# Altium PCB PCB_IcedTea_2021-08-14.pcbdoc
Units mil, origin at the board's own origin, x right, y up, seen from the top; angles counter-clockwise.
Board outline 4400.78 x 4465 mil, 2 copper layers (Top Layer, Bottom Layer); 39 components, 33 nets, 162 pads, 161 vias.
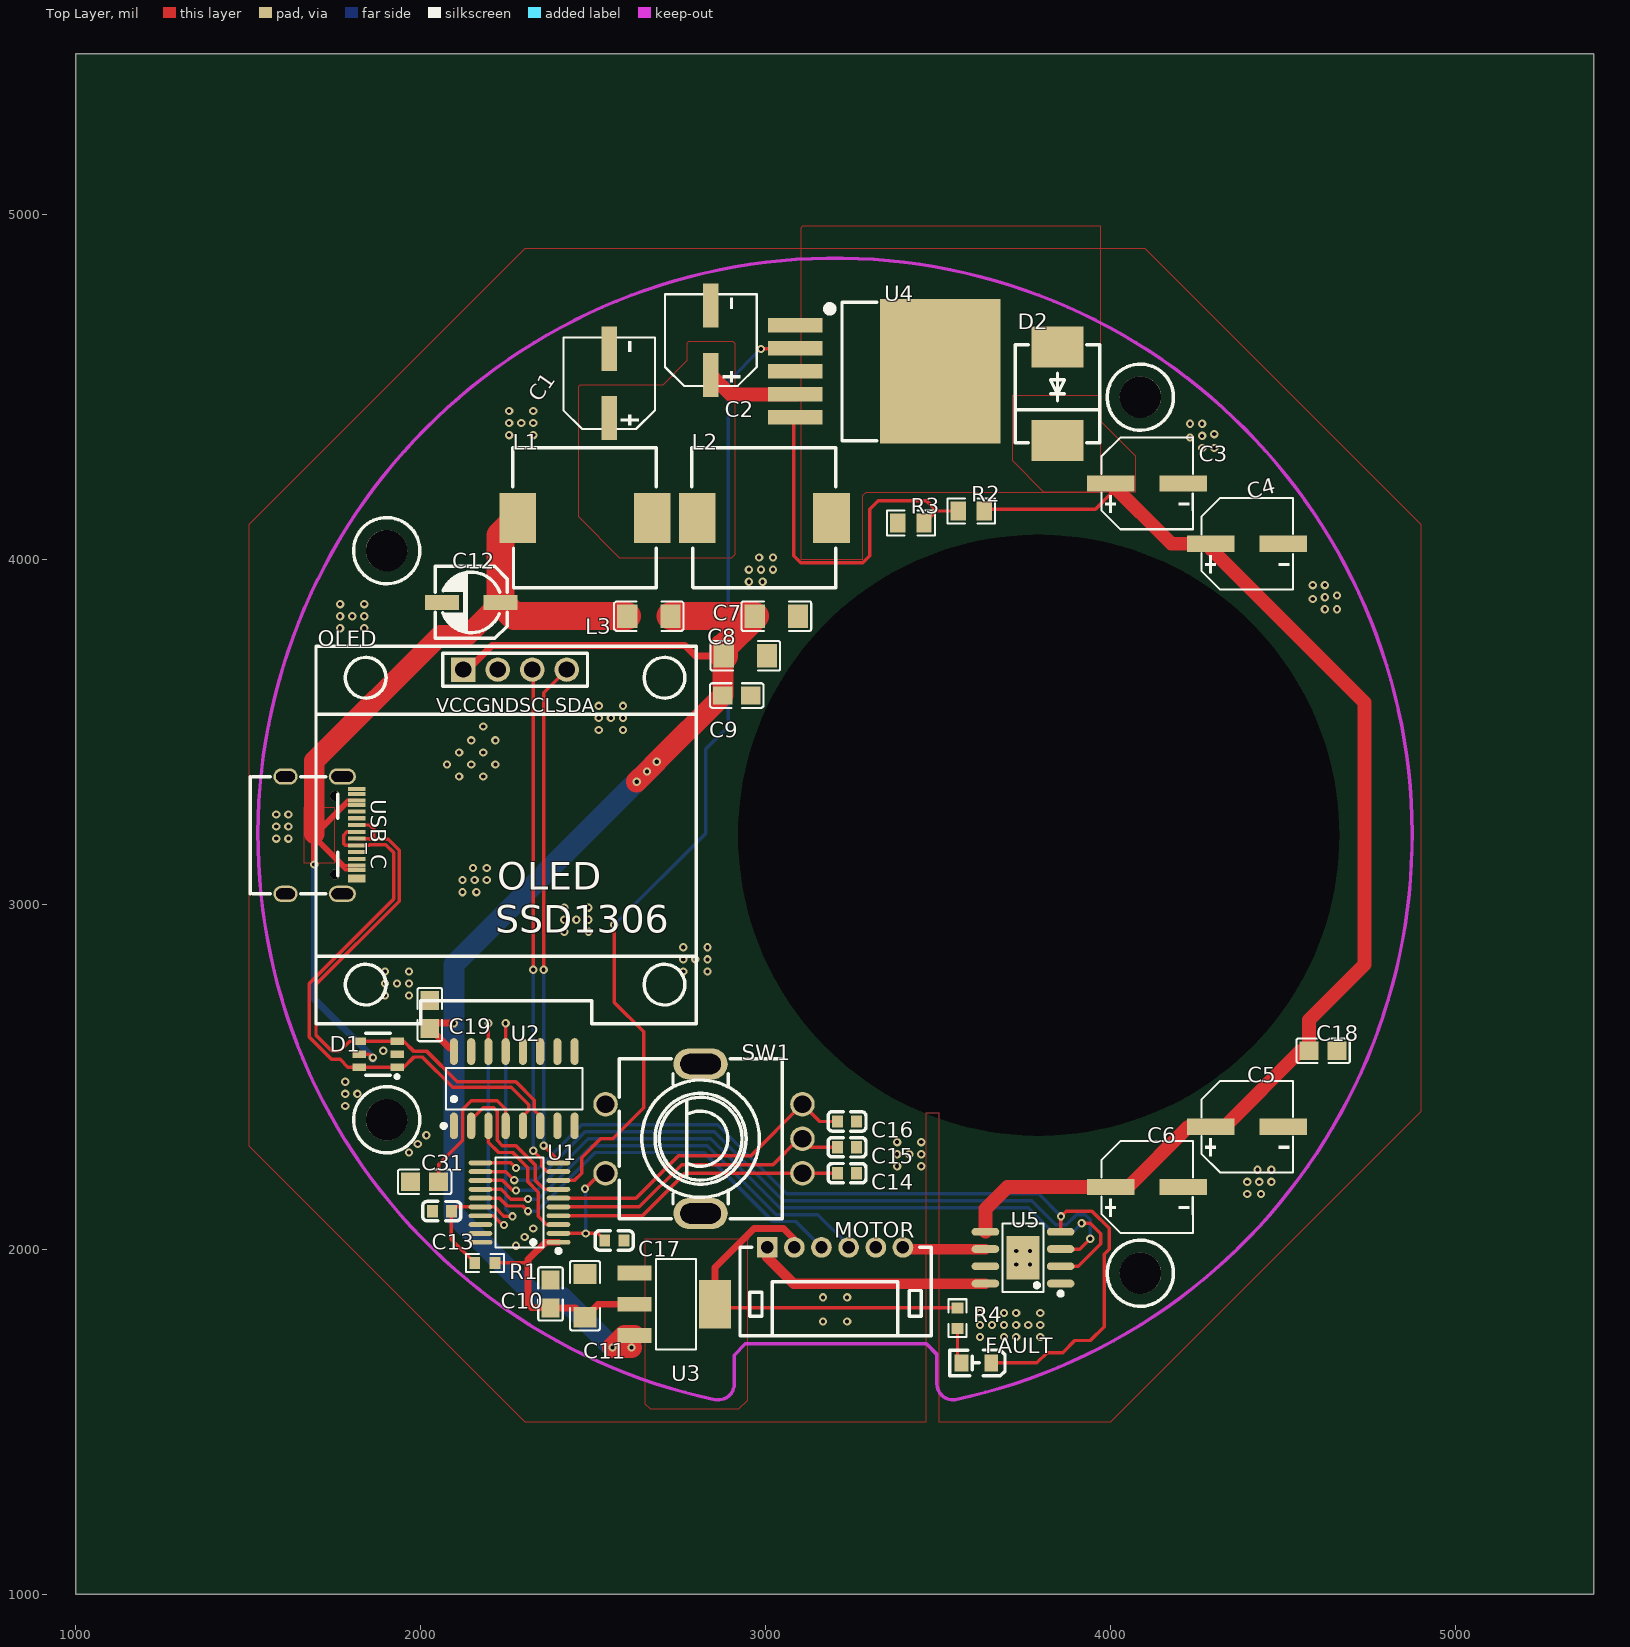
[diagram p0: Top Layer view]
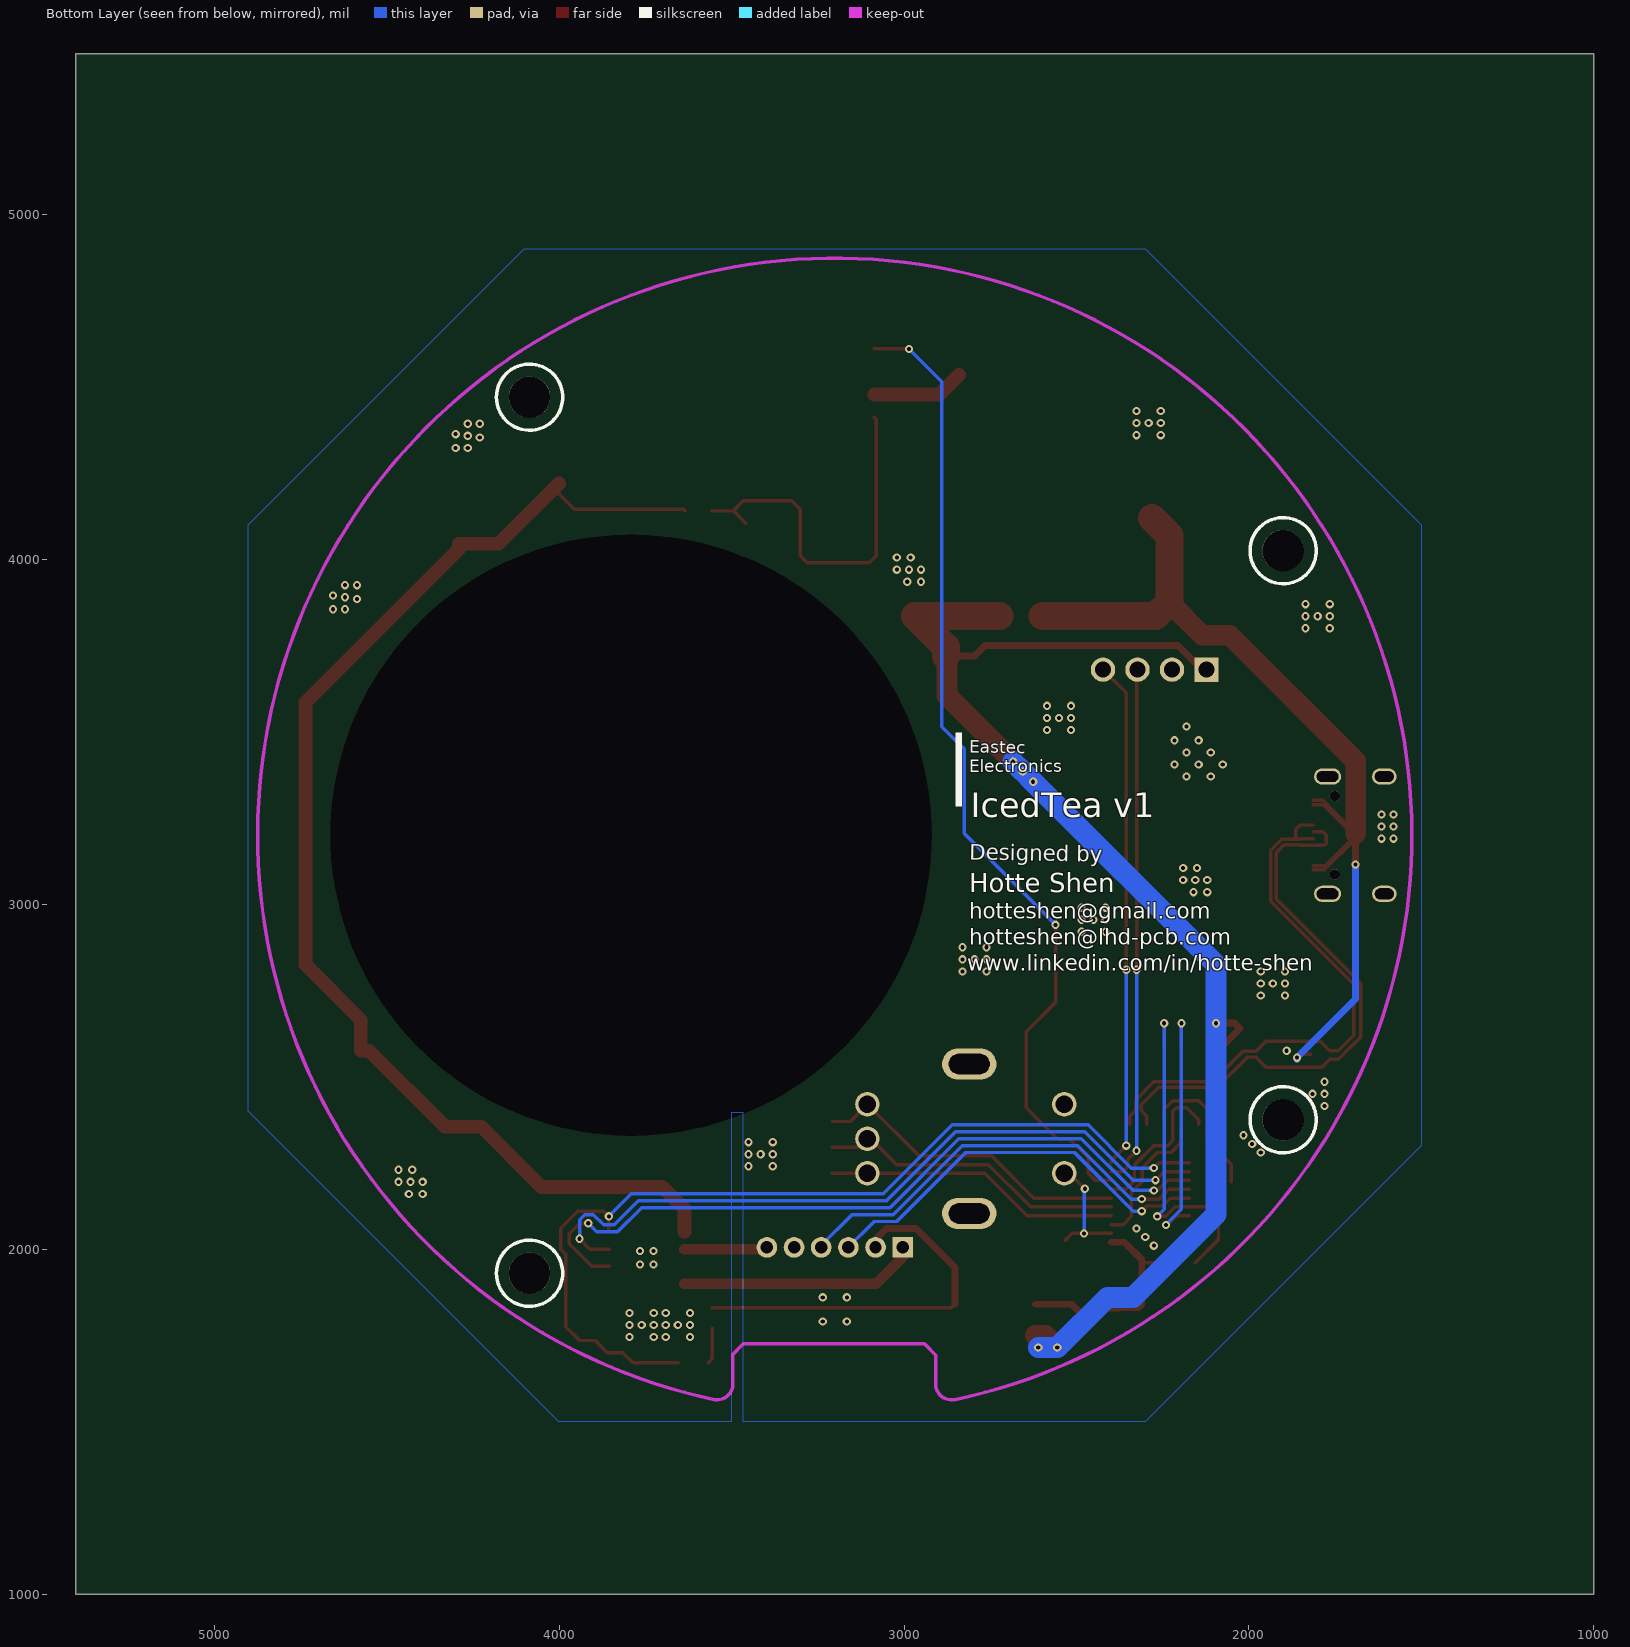
[diagram p1: Bottom Layer view, seen from below]

## Layer stack, top to bottom
Top Layer: signal copper (thickness not stored)
Dielectric: dielectric 12.6, FR-4, Dk 4.8
Bottom Layer: signal copper (thickness not stored)

## Board outline
5400.78,1000 1000,1000 1000,5465 5400.78,5465
cut-out: 2920.19,3200 cw(c3791.33,3200) 4662.47,3200 cw(c3791.33,3200) 2920.19,3200

## Components (designator, comment, footprint, x,y, rotation, side; value= is the part's Value field where it differs from the comment)
C1 "220uF" CAP-SMD_BD6.3-L6.6-W6.6-RD 2545.78,4510 r270 top
C2 "220uF" CAP-SMD_BD6.3-L6.6-W6.6-RD 2840.78,4635 r270 top
C3 "47uF" CAP-SMD_BD6.3-L6.6-W6.6-FD 4105.78,4220 r0 top
C4 "47uF" CAP-SMD_BD6.3-L6.6-W6.6-FD 4395.78,4045 r0 top
C5 "47uF" CAP-SMD_BD6.3-L6.6-W6.6-FD 4395.78,2355 r0 top
C6 "47uF" CAP-SMD_BD6.3-L6.6-W6.6-FD 4105.78,2180 r0 top
C7 "10uF" C1206 3030.78,3835 r180 top
C8 "10uF" C1206 2940.78,3720 r180 top
C9 "100nF" C0805 2915.78,3605 r180 top
C10 "100nF" C0805 2375.78,1870 r270 top
C11 "10uF" C1206 2475.78,1865 r270 top
C12 "47uF" CAP-SMD_BD5.0-L5.3-W5.3-RD 2145.78,3875 r0 top
C13 "1nF" C0603 2060.78,2110 r0 top
C14 "10nF" C0603 3235.78,2220 r0 top
C15 "10nF" C0603 3235.78,2295 r0 top
C16 "10nF" C0603 3235.78,2370 r0 top
C17 "10nF" C0603 2560.78,2025 r0 top
C18 "100nF" C0805 4615.78,2575 r180 top
C19 "100nF" C0805 2025.78,2680 r90 top
C31 "100nF" C0805 2010.78,2195 r180 top
D1 "USBLC6-4SC6" SOT-23-6_L2.9-W1.6-P0.95-LS2.8-BR 1875.78,2565 r0 top
D2 "SS54_C16103" SMC_L7.1-W6.2-LS8.1-R-RD 3845.78,4480 r90 top
FAULT "FC-2012HRK-620D" LED0805-RD 3610.78,1670 r180 top
L1 "47uH" IND-SMD_L10.5-W10.3_SLD10D50 2475.78,4120 r0 top
L2 "47uH" IND-SMD_L10.5-W10.3_SLD10D50 2995.78,4120 r0 top
L3 "10uH" L1206 2660.78,3835 r0 top
MOTOR "X2016WR-06B-N0SN" CONN-TH_6P-P2.00_X2016WR-06B-N0SN 3200.78,2005 r0 top
OLED "A2541HWV-4P" OLED12864 1695.78,3747.24 r0 top
R1 "47K" R0603 2185.78,1960 r0 top
R2 "27K" R0805 3595.78,4140 r0 top
R3 "2.7K" R0805 3420.78,4105 r180 top
R4 "100" R0603 3555.78,1800 r90 top
SW1 "EC11E1534408" SW-TH_EC11XXXXXXXX 2820.78,2320 r90 top
U1 "MSP430G2553IPW20" TSSOP-20_L6.5-W4.4-P0.65-LS6.4-BL 2285.78,2135 r90 top
U2 "CH340B" SOIC-16_L9.9-W3.9-P1.27-LS6.0-BL 2270.78,2465 r0 top
U3 "AMS1117-3.3" SOT-223-3_L6.5-W3.4-P2.30-LS7.0-BR 2735.78,1840 r180 top
U4 "XL6019E1" TO-263-5_L10.2-W9.9-P1.70-LS14.4-TL 3295.78,4545 r0 top
U5 "DRV8872DDAR" HSOP-8_L5.0-W4.0-P1.27-LS6.2-BL-EP 3745.78,1975 r90 top
USB_C "TYPE-C-31-M-12" USB-C_SMD-TYPE-C-31-M-12 1710.78,3200 r270 top

## Footprints (in the part's own frame and the unit in brackets; to place one, negate y for a bottom-side part, rotate by r counter-clockwise, add the part's x,y. Pads: shape width x height; smd on the part's side, far side on the other; paste and mask are expansions set on the pad)
C0603 [mm]
  rect 0.8x0.9 smd: 1(-0.7,0) 2(0.7,0)
  silkscreen extent -1.41,-0.71 1.39,0.72
C0805 [mm]
  rect 1.41x1.35 smd: 1(-1.03,0) 2(1.03,0)
  silkscreen extent -1.96,-0.9 1.96,0.9
C1206 [mm]
  rect 1.485x1.728 smd: 1(-1.593,0) 2(1.593,0)
  silkscreen extent -2.56,-1.09 2.56,1.09
CAP-SMD_BD5.0-L5.3-W5.3-RD [mm]
  rect 2.5x1.1 smd: 1(2.15,0) 2(-2.15,0)
  silkscreen extent -2.65,-2.65 2.65,2.65
CAP-SMD_BD6.3-L6.6-W6.6-FD [mm]
  rect 3.5x1.2 smd: 1(-2.67,0) 2(2.67,0)
  silkscreen extent -3.38,-3.38 3.38,3.38
CAP-SMD_BD6.3-L6.6-W6.6-RD [mm]
  rect 3.26x1.15 smd: 1(2.555,0) 2(-2.555,0)
  silkscreen extent -3.39,-3.38 3.36,3.38
CONN-TH_6P-P2.00_X2016WR-06B-N0SN [mil]
  rect 60x60 hole 36: 1(-196.85,0)
  round 60 hole 36: 2(-118.11,0) 3(-39.37,0) 4(39.37,0) 5(118.11,0) 6(196.85,0)
  silkscreen extent -276,-256 279,0
HSOP-8_L5.0-W4.0-P1.27-LS6.2-BL-EP [mm]
  oval 0.574x2.038 smd: 1(-1.905,-2.769) 2(-0.635,-2.769) 3(0.635,-2.769) 4(1.905,-2.769) 5(1.905,2.769) 6(0.635,2.769) 7(-0.635,2.769) 8(-1.905,2.769)
  rect 3.2x2.4 smd: 9(0,0)
  silkscreen extent -2.79,-2.92 2.53,1.52
IND-SMD_L10.5-W10.3_SLD10D50 [mm]
  rect 2.7x3.7 smd: 1(-4.95,0) 2(4.95,0)
  silkscreen extent -5.33,-5.15 5.25,5.15
L1206 [mm]
  rect 1.485x1.728 smd: 1(-1.593,0) 2(1.593,0)
  silkscreen extent -2.56,-1.09 2.56,1.09
LED0805-RD [mm]
  rect 1x1.25 smd: 1(-1.1,0) 2(1.1,0)
  silkscreen extent -2.1,-0.95 1.98,0.96
OLED12864 [mm]
  rect 1.8x1.8 hole 1.2: 1(10.855,-1.704)
  round 1.8 hole 1.2: 2(13.395,-1.704) 3(15.935,-1.704) 4(18.475,-1.704)
  silkscreen extent 0,-27.8 28,0
R0603 [mil]
  rect 31.75x34.02 smd: 1(-29.65,0) 2(29.66,0)
  silkscreen extent -55,-26 55,26
R0805 [mil]
  rect 44.59x54.21 smd: 1(-38.04,0) 2(38.04,0)
  silkscreen extent -69,-36 69,36
SMC_L7.1-W6.2-LS8.1-R-RD [mm]
  rect 3.03x3.82 smd: 1(3.435,0) 2(-3.435,0)
  silkscreen extent -3.6,-3.11 3.6,3.11
SOIC-16_L9.9-W3.9-P1.27-LS6.0-BL [mil]
  oval 23.7x77.6 smd: 1(-175,-107.7) 2(-125,-107.7) 3(-75,-107.7) 4(-25,-107.7) 5(25,-107.7) 6(75,-107.7) 7(125,-107.7) 8(175,-107.7) 9(175,107.7) 10(125,107.7) 11(75,107.7) 12(25,107.7) 13(-25,107.7) 14(-75,107.7) 15(-125,107.7) 16(-175,107.7)
  silkscreen extent -211,-114 198,60
SOT-23-6_L2.9-W1.6-P0.95-LS2.8-BR [mm]
  rect 1x0.55 smd: 1(1.4,-0.95) 2(1.4,0) 3(1.4,0.95) 4(-1.4,0.95) 5(-1.4,0) 6(-1.4,-0.95)
  silkscreen extent -0.9,-1.78 1.52,1.55
SOT-223-3_L6.5-W3.4-P2.30-LS7.0-BR [mm]
  rect 2.5x1.1 smd: 1(2.97,-2.3) 2(2.97,0) 3(2.97,2.3)
  rect 2.34x3.6 smd: 4(-2.97,0)
  silkscreen extent -1.57,-3.33 1.37,3.33
SW-TH_EC11XXXXXXXX [mm]
  oval 2.3x4 hole 1.5 slot 3 at 90 deg: 6(5.5,0.25) 7(-5.5,0.25)
  round 1.8 hole 1.3: A(-2.54,-7.25) B(2.54,-7.25) C(0,-7.25) D(-2.54,7.25) E(2.54,7.25)
  silkscreen extent -5.9,-5.75 5.9,6.25
TO-263-5_L10.2-W9.9-P1.70-LS14.4-TL [mm]
  rect 4x1.069 smd: 1(-5.334,3.4) 2(-5.334,1.7) 3(-5.334,0) 4(-5.334,-1.7) 5(-5.334,-3.4)
  rect 8.89x10.66 smd: 6(5.334,0)
  silkscreen extent -3.05,-5.1 0.66,5.1
TSSOP-20_L6.5-W4.4-P0.65-LS6.4-BL [mm]
  oval 0.364x1.742 smd: 1(-2.925,-2.871) 2(-2.275,-2.871) 3(-1.625,-2.871) 4(-0.975,-2.871) 5(-0.325,-2.871) 6(0.325,-2.871) 7(0.975,-2.871) 8(1.625,-2.871) 9(2.275,-2.871) 10(2.925,-2.871) 11(2.925,2.871) 12(2.275,2.871) 13(1.625,2.871) 14(0.975,2.871) 15(0.325,2.871) 16(-0.325,2.871) 17(-0.975,2.871) 18(-1.625,2.871) 19(-2.275,2.871) 20(-2.925,2.871)
  silkscreen extent -3.71,-3.02 3.33,1.77
USB-C_SMD-TYPE-C-31-M-12 [mm]
  oval 1.2x2 hole 0.8 slot 1.6 at 90 deg: 0(-4.32,1.556) 0(4.32,1.556)
  oval 1.2x1.8 hole 0.8 slot 1.4 at 90 deg: 0(-4.32,-2.624) 0(4.32,-2.624)
  rect 0.3x1.3 smd: A1(-3.4,2.624) A4(-2.56,2.624) A5(-1.25,2.624) A6(-0.25,2.624) A7(0.25,2.624) A8(1.25,2.624) A9(2.55,2.624) A12(3.35,2.624) B1(3.05,2.624) B4(2.24,2.624) B5(1.75,2.624) B6(0.75,2.624) B7(-0.75,2.624) B8(-1.75,2.624) B9(-2.24,2.624) B12(-3.05,2.624)
  round 0.75 hole 0.75 unplated: ""(-2.89,1.026) ""(2.89,1.026)
  silkscreen extent -4.32,-5.23 4.32,1.22

## Free pads (board coordinates)
  round 120 hole 120 unplated: ""(1900.78,2375) ""(1900.78,4025) ""(4085.78,1930) ""(4085.78,4470)

## Via types
v1: diameter 24, hole 12, Top Layer to Bottom Layer, 161 vias

## Nets (pads, with @x,y where several pads share a name; then routed paths per layer and width w, separated by ;. In a path a pad name is that pad's centre, name@x,y a point inside that pad or via, vN(x,y) a via of type N, cw(c..) or ccw(c..) an arc to the next point about the centre after c; other vN are vias at no path point)
3V3: C10.2 C11.2 MOTOR.2 R1.2 R4.2 U1.1 U3.2 U3.4 | length 1800.4
  Top Layer w10: R1.2@2215.48,1960 2310.78,1960.4 ; U3.4 2863.05,1829.66 R4.2
  Top Layer w20: C10.2 2448.63,1829.45 C11.2 2513.48,1840 U3.2 ; C10.2@2375.78,1829.5 2320.78,1830 2310.78,1840 2310.78,1970 2360.58,2019.8 U1.1 ; U3.4 2852.68,1946.9 2965.78,2060 3050.78,2060 3082.68,2028.1 MOTOR.2
5V: C7.2 C8.2 C9.2 C19.1 L3.2 OLED.1 U2.16 U3.3 | length 4195.8
  Top Layer w20: C19.1 2082.53,2582.7 U2.16@2095.78,2582.7 ; C19.1@2025.78,2639.5 2041.28,2655 v1(2095.78,2655) ; OLED.1@2123.18,3680.2 2135.98,3680.2 2205.78,3750 2765.78,3750 2795.78,3720 C8.2
  Top Layer w60.95: v1(2610.78,1715) v1(2555.78,1715) 2590.23,1749.45 U3.3 ; v1(2625.78,3355) v1(2655.78,3385) 2655.78,3385.12 v1(2683.66,3413) C9.2@2875.28,3605 ; C9.2 2875.23,3717.15 C8.2
  Top Layer w81.26: L3.2 C7.2 2878.08,3745 C8.2
  Bottom Layer w60.95: v1(2610.78,1715) v1(2555.78,1715) 2410.78,1860 2335.78,1860 2095.78,2100 2095.78,2825 v1(2625.78,3355) v1(2655.78,3385) v1(2683.66,3413)
12V: C3.1 C4.1 C5.1 C6.1 C18.2 D2.2 R2.2 U5.5 | length 3695.6
  Top Layer w10: R2.2 3638.78,4145 3955.78,4145 4000.68,4189.9 C3.1
  Top Layer w40: U5.5 3636.78,2116 3700.78,2180 C6.1 4050.78,2180 4225.78,2355 C5.1 4330.78,2355 4550.78,2575 C18.2 4575.18,2664.5 4735.78,2825 4735.78,3585 4290.66,4030.12 C4.1 4175.66,4045 C3.1
BOOST: U1.8 U4.2 | length 2873.9
  Top Layer w10: U1.8 2444.78,2199 2465.78,2220 2465.78,2265 2520.78,2320 2555.78,2320 2645.78,2410 2645.78,2630 2560.78,2715 v1(2560.78,2940) ; v1(2985.78,4610) 3085.78,4610 U4.2
  Bottom Layer w10: v1(2560.78,2940) 2825.78,3205 2825.78,3450 2890.78,3515 2890.78,4515 v1(2985.78,4610)
C31_1: C31.1 U2.4 | length 427.6
  Top Layer w10: C31.1 2051.28,2245.5 2120.78,2315 2120.78,2405 2145.78,2430 2220.78,2430 2245.78,2405 U2.4@2245.78,2361.9
DRV1: U1.12 U5.3 | length 2120.1
  Top Layer w10: U1.12 2246.21,2224.57 v1(2270.78,2200) ; U5.3 3910.78,2000 v1(3940.78,2030)
  Bottom Layer w10: v1(2270.78,2200) 2335.78,2200 2475.78,2340 2850.78,2340 3050.78,2140 3770.78,2140 3840.78,2070 3870.78,2070 3900.78,2100 3925.78,2100 3940.78,2085 v1(3940.78,2030)
DRV2: U1.13 U5.2 | length 2179.7
  Top Layer w10: U1.13@2172.78,2199 2236.78,2199 2265.78,2170 v1(2275.78,2170) ; U5.2 3905.78,1950 3970.78,2015 3970.78,2045 3940.78,2075 v1(3915.78,2075)
  Bottom Layer w10: v1(2275.78,2170) 2335.78,2170 2485.78,2320 2840.78,2320 3040.78,2120 3760.78,2120 3830.78,2050 3890.78,2050 v1(3915.78,2075)
DTR: C13.2 R1.1 U1.16 U2.13 | length 1007
  Top Layer w10: R1.1 2088.34,2027.78 C13.2 2100.55,2122.21 U1.16 2213.57,2122.21 2240.78,2095 v1(2265.78,2095) ; U2.13@2245.78,2588.09 v1(2245.78,2655)
  Bottom Layer w10: v1(2245.78,2655) 2245.78,2115 v1(2265.78,2095)
ENC_A: MOTOR.4 U1.14 | length 1268.9
  Top Layer w10: U1.14 2232.39,2173.39 2260.78,2145 v1(2310.78,2145)
  Bottom Layer w10: v1(2310.78,2145) 2340.78,2145 2495.78,2300 2830.78,2300 3030.78,2100 3150.78,2100 3240.18,2010.6 MOTOR.4@3240.18,2005
ENC_B: MOTOR.3 U1.15 | length 1188.6
  Top Layer w10: U1.15 2227.98,2147.8 2250.78,2125 2295.78,2125 v1(2310.78,2110)
  Bottom Layer w10: v1(2310.78,2110) 2335.78,2110 2505.78,2280 2820.78,2280 3020.78,2080 3086.38,2080 MOTOR.3
FAULT_2: FAULT.2 R4.1 | length 105.2
  Top Layer w10: R4.1 3555.78,1681.69 FAULT.2
GND: C1.2 C2.2 C3.2 C4.2 C5.2 C6.2 C7.1 C8.1 C9.1 C10.1 C11.1 C12.2 C13.1 C14.2 C15.2 C16.2 C17.2 C18.1 C19.2 C31.2 D1.2 MOTOR.5 OLED.2 R3.2 SW1.6 SW1.7 SW1.E U1.20 U2.1 U3.1 U4.1 U5.1 U5.7 U5.9 USB_C.0 USB_C.A1 USB_C.A12 USB_C.B1 USB_C.B12
  other v1: 3620.78,1745 3690.78,1745 3725.78,1745 3795.78,1745 3620.78,1780 3655.78,1780 3690.78,1780 3725.78,1780 3760.78,1780 3795.78,1780 3165.78,1790 3235.78,1790 3620.78,1815 3690.78,1815 3725.78,1815 3795.78,1815 3165.78,1860 3235.78,1860 3726.1,1955.32 3765.47,1955.32 3726.1,1994.69 3765.47,1994.69 2275.78,2010 2300.78,2035 2325.78,2060 4395.78,2160 4435.78,2160 4395.78,2195 4430.78,2195 4465.78,2195 4425.78,2230 4465.78,2230 3380.78,2240 3450.78,2240 3380.78,2275 3415.78,2275 3450.78,2275 1965.78,2280 1990.78,2305 3380.78,2310 3450.78,2310 2015.78,2330 1780.78,2415 1780.78,2450 1815.78,2450 1780.78,2485 1890.78,2575 1895.78,2735 1965.78,2735 1895.78,2770 1930.78,2770 1965.78,2770 1895.78,2805 1965.78,2805 2760.78,2805 2830.78,2805 2760.78,2840 2795.78,2840 2830.78,2840 2760.78,2875 2830.78,2875 2415.78,2920 2485.78,2920 2415.78,2955 2450.78,2955 2485.78,2955 2415.78,2990 2485.78,2990 2120.78,3035 2160.78,3035 2120.78,3070 2155.78,3070 2190.78,3070 2150.78,3105 2190.78,3105 1580.78,3190 1615.78,3190 1580.78,3225 1615.78,3225 1580.78,3260 1615.78,3260 2110.78,3370 2180.78,3370 2075.78,3405 2145.78,3405 2215.78,3405 2110.78,3440 2180.78,3440 2145.78,3475 2215.78,3475 2515.78,3505 2585.78,3505 2180.78,3515 2515.78,3540 2550.78,3540 2585.78,3540 2515.78,3575 2585.78,3575 1765.78,3800 1835.78,3800 1765.78,3835 1800.78,3835 1835.78,3835 4620.78,3855 4655.78,3855 1765.78,3870 1835.78,3870 4585.78,3885 4620.78,3890 4655.78,3895 4585.78,3925 4620.78,3925 2950.78,3935 2990.78,3935 2950.78,3970 2985.78,3970 3020.78,3970 2980.78,4005 3020.78,4005 4265.09,4322.92 4300.09,4322.92 4230.09,4352.92 4265.09,4357.92 2255.78,4360 2325.78,4360 4300.09,4362.92 4230.09,4392.92 4265.09,4392.92 2255.78,4395 2290.78,4395 2325.78,4395 2255.78,4430 2325.78,4430
NFAULT: FAULT.1 U1.11 U5.4 | length 2724.6
  Top Layer w10: U1.11 2260.62,2250.16 v1(2275.78,2235) ; FAULT.1 3785.78,1670 3815.78,1700 3860.78,1700 3895.78,1735 3940.78,1735 3980.78,1775 3980.78,1985 3995.78,2000 3995.78,2060 3945.78,2110 3870.78,2110 v1(3855.78,2095) 3855.78,2050.98 U5.4
  Bottom Layer w10: v1(2275.78,2235) 2340.78,2235 2465.78,2360 2860.78,2360 3060.78,2160 3790.78,2160 v1(3855.78,2095)
ROT_A: C14.1 SW1.A U1.4 | length 860.5
  Top Layer w10: U1.4 2642.39,2096.61 2765.78,2220 SW1.A C14.1
ROT_B: C16.1 SW1.B U1.6 | length 942.9
  Top Layer w10: U1.6 2623.58,2147.8 2745.78,2270 2956.18,2270 SW1.B 3156.22,2370 C16.1
ROT_C: C15.1 SW1.C U1.5 | length 901.7
  Top Layer w10: U1.5 2632.98,2122.2 2755.78,2245 3020.78,2245 3095.78,2320 SW1.C 3131.22,2295 C15.1
ROT_D: C17.1 SW1.D U1.2 | length 351.6
  Top Layer w10: U1.2 v1(2478.02,2045.43) 2512.79,2045.43 C17.1 ; v1(2475.78,2175) 2520.78,2220 SW1.D@2535.38,2220
  Bottom Layer w10: v1(2475.78,2175) 2478.02,2172.76 v1(2478.02,2045.43)
RTS: U1.17 U2.14 | length 749.6
  Top Layer w10: U1.17 2209.17,2096.61 2235.78,2070 v1(2240.78,2070) ; U2.14@2195.78,2588.09 v1(2195.78,2655)
  Bottom Layer w10: v1(2195.78,2655) 2195.78,2115 v1(2240.78,2070)
RXD: U1.3 U2.3 | length 418.3
  Top Layer w10: U2.3@2195.78,2361.9 2195.78,2310 2225.78,2280 2265.78,2280 2309.88,2235.9 2309.88,2195.9 2340.78,2165 2340.78,2095 2364.78,2071 U1.3
S$3736: 
S$3741: 
S$3743: 
SCL: OLED.3 U1.9 | length 1506
  Top Layer w10: OLED.3@2323.14,3680.15 2325.78,3677.51 v1(2325.78,2810) ; v1(2325.78,2285) 2350.78,2260 2350.78,2240 2366.18,2224.6 U1.9
  Bottom Layer w10: v1(2325.78,2285) v1(2325.78,2810)
SDA: OLED.4 U1.10 | length 1475.7
  Top Layer w10: v1(2355.78,2300) 2398.81,2256.97 U1.10 ; v1(2355.78,2810) 2355.78,3612.79 OLED.4@2423.14,3680.15
  Bottom Layer w10: v1(2355.78,2300) v1(2355.78,2810)
TXD: U1.7 U2.2 | length 454.8
  Top Layer w10: U2.2@2145.78,2361.9 2145.78,2375 2180.78,2410 2210.78,2410 2220.78,2400 2220.78,2315 2235.78,2300 2275.78,2300 2331.88,2243.9 2331.88,2198.9 2357.38,2173.4 U1.7
U4_3: D2.1 L2.2 U4.3 U4.6
U4_4: C1.1 C2.1 L1.2 L2.1 U4.4 | length 268.3
  Top Layer w40: C2.1 2897.11,4478.08 U4.4
U4_5: R2.1 R3.1 U4.5 | length 1120.7
  Top Layer w10: U4.5 3080.78,4406.2 3080.78,4010 3100.78,3990 3280.78,3990 3300.78,4010 3300.78,4145 3325.78,4170 3465.78,4170 3495.78,4140 3510.48,4140 ; R3.1 3493.82,4140 R2.1
U5_6: MOTOR.6 U5.6 | length 241.2
  Top Layer w30: MOTOR.6 3402.63,2000 U5.6
U5_8: MOTOR.1 U5.8 | length 692.8
  Top Layer w30: MOTOR.1 3003.93,1976.85 3080.78,1900 U5.8
USB_N: D1.3 D1.4 U2.6 USB_C.A7 USB_C.B7 | length 1667.4
  Top Layer w10: USB_C.A7 1849.68,3190.2 1851.58,3188.3 1904.98,3188.3 1936.78,3156.6 1936.78,3008.4 1695.78,2767.4 1695.78,2620 1740.78,2575 1765.78,2575 1793.18,2602.4 D1.4 ; USB_C.B7 1851.25,3229.53 1863.94,3216.83 1863.94,3188.3 ; D1.4 D1.3 1950.58,2602.4 1979.98,2573 2017.78,2573 2105.78,2485 2275.78,2485 2328.78,2432 2328.78,2402.2 2345.78,2385.2 U2.6@2345.78,2361.9
USB_P: D1.1 D1.6 U2.5 USB_C.A6 USB_C.B6 | length 1666.7
  Top Layer w10: USB_C.A6 1785.58,3209.8 1775.78,3200 1775.78,3175 1780.28,3170.5 USB_C.B6 1849.68,3170.5 1851.58,3172.3 1898.38,3172.3 1920.78,3149.9 1920.78,3015 1675.78,2770 1675.78,2615 1740.78,2550 1765.78,2550 1788.18,2527.6 D1.6 ; D1.6 D1.1 1950.58,2527.6 1979.98,2557 2003.78,2557 2091.78,2469 2261.78,2469 2312.78,2418 2312.78,2402.2 2295.78,2385.2 U2.5@2295.78,2361.9
VBUS: C12.1 D1.5 L1.1 L3.1 USB_C.A4 USB_C.A9 USB_C.B4 USB_C.B9 | length 3021.4
  Top Layer w10: USB_C.A9 1781.18,3099.6 1690.78,3190 1690.78,3205 ; USB_C.B4 1778.98,3111.8 1690.78,3200 1690.78,3205 ; USB_C.B9 1783.98,3288.2 1700.78,3205 1690.78,3205 ; USB_C.A4 1786.58,3300.8 1690.78,3205 ; D1.5 1850.78,2565 v1(1860.78,2555)
  Top Layer w20: v1(1690.78,3115) 1690.78,3205
  Top Layer w60: 1690.78,3205 1690.78,3415 2055.78,3780 2135.48,3780 C12.1@2230.48,3875
  Top Layer w81.26: L1.1 2230.43,4069.53 C12.1 2270.42,3835 L3.1
  Bottom Layer w20: v1(1690.78,3115) 1690.78,2725 v1(1860.78,2555) v1@1860.78,2550
pads on no net: U1.18 U1.19 U2.7 U2.8 U2.9 U2.10 U2.11 U2.12 U2.15 USB_C. USB_C.A5 USB_C.A8 USB_C.B5 USB_C.B8

## Polygon pours and split planes (outlines as drawn)
GND on Bottom Layer (solid): 3200.78,1500 3465.78,1500 3465.78,2395 3500.78,2395 3500.78,1500 4000.78,1500 4900.78,2400 4900.78,4000 4900.78,4100 4100.78,4900 2300.78,4900 1500.78,4100 1500.78,2300 2300.78,1500 3200.78,1500
12V on Top Layer (solid): 3715.78,4475 3970.78,4475 3970.78,4400 4070.78,4300 4070.78,4195 3805.78,4195 3715.78,4285 3715.78,4475
U4_3 on Top Layer (solid): 3105.78,4965 3100.78,4960 3100.78,4000 3280.78,4000 3280.78,4185 3290.78,4195 3970.78,4195 3970.78,4965
U4_4 on Top Layer (solid): 2455.78,4500 2455.78,4125 2575.78,4005 2900.78,4005 2910.78,4015 2910.78,4625 2905.78,4630 2775.78,4630 2770.78,4625 2770.78,4575 2700.78,4505 2460.78,4505
3V3 on Top Layer (solid): 2650.78,2030 2950.78,2030 2945.78,2025 2945.78,1560 2920.78,1535 2665.78,1535 2650.78,1550 2650.78,2030
VBUS on Top Layer (solid): 1660.78,3265 1660.78,3120 1750.78,3120 1750.78,3280 1660.78,3280
GND on Top Layer (solid): 3200.78,1500 3465.78,1500 3465.78,2395 3500.78,2395 3500.78,1500 4000.78,1500 4900.78,2400 4900.78,4000 4900.78,4100 4100.78,4900 2300.78,4900 1500.78,4100 1500.78,2300 2300.78,1500 3200.78,1500

## Keep-outs
Keep-Out Layer:
  lines w10: 2852.89,1563.34 cw(c3200.78,3200) 3548.66,1563.34 ; 2858.88,1562.83 ccw(c2862.12,1609.17) 2908.56,1608 ; 3496.26,1608 ccw(c3542.71,1609.17) 3545.95,1562.83

## Silkscreen, mask and mechanical layers (free items; w line width, h text height)
Top Overlay:
  circle w10: c4085.78,4470 r96.05
  circle w10: c1900.78,4025 r96.05
  circle w10: c1900.78,2375 r96.05
  circle w10: c4085.78,1930 r96.05
Bottom Overlay:
  circle w10: c1900.78,4025 r96.05
  circle w10: c1900.78,2375 r96.05
  circle w10: c4085.78,1930 r96.05
  circle w10: c4085.78,4470 r96.05
  rectangle: 2831.33,3282.91 2850.23,3497.09
  text "Eastec" at 2811.64,3438.98 h36.22 r1
  text "Electronics" at 2810.78,3381.89 h36.22
  text "IcedTea v1" at 2806.33,3251.66 h70.87
  text "Designed by" at 2811.17,3128.16 h45 r1
  text "Hotte Shen" at 2810.78,3034.91 h55.12
  text "hotteshen@gmail.com" at 2810.78,2958.09 h45
  text "hotteshen@lhd-pcb.com" at 2810.78,2882.5 h45
  text "www.linkedin.com/in/hotte-shen" at 2817.08,2806.91 h45

## Text inside footprints (layer, text, board x,y; h text height)
OLED: Top Overlay "VCCGNDSCLSDA" at 2044.32,3556.81 h40; Top Overlay "SSD1306" at 2215.78,2917.24 h80